# Altium PCB PCB2.pcbdoc
Units mm, origin at the board's own origin, x right, y up, seen from the top; angles counter-clockwise.
Board outline 129.16 x 123.45 mm, 4 copper layers (Top Layer, Inner1, Inner2, Bottom Layer); 95 components, 56 nets, 306 pads, 275 vias.
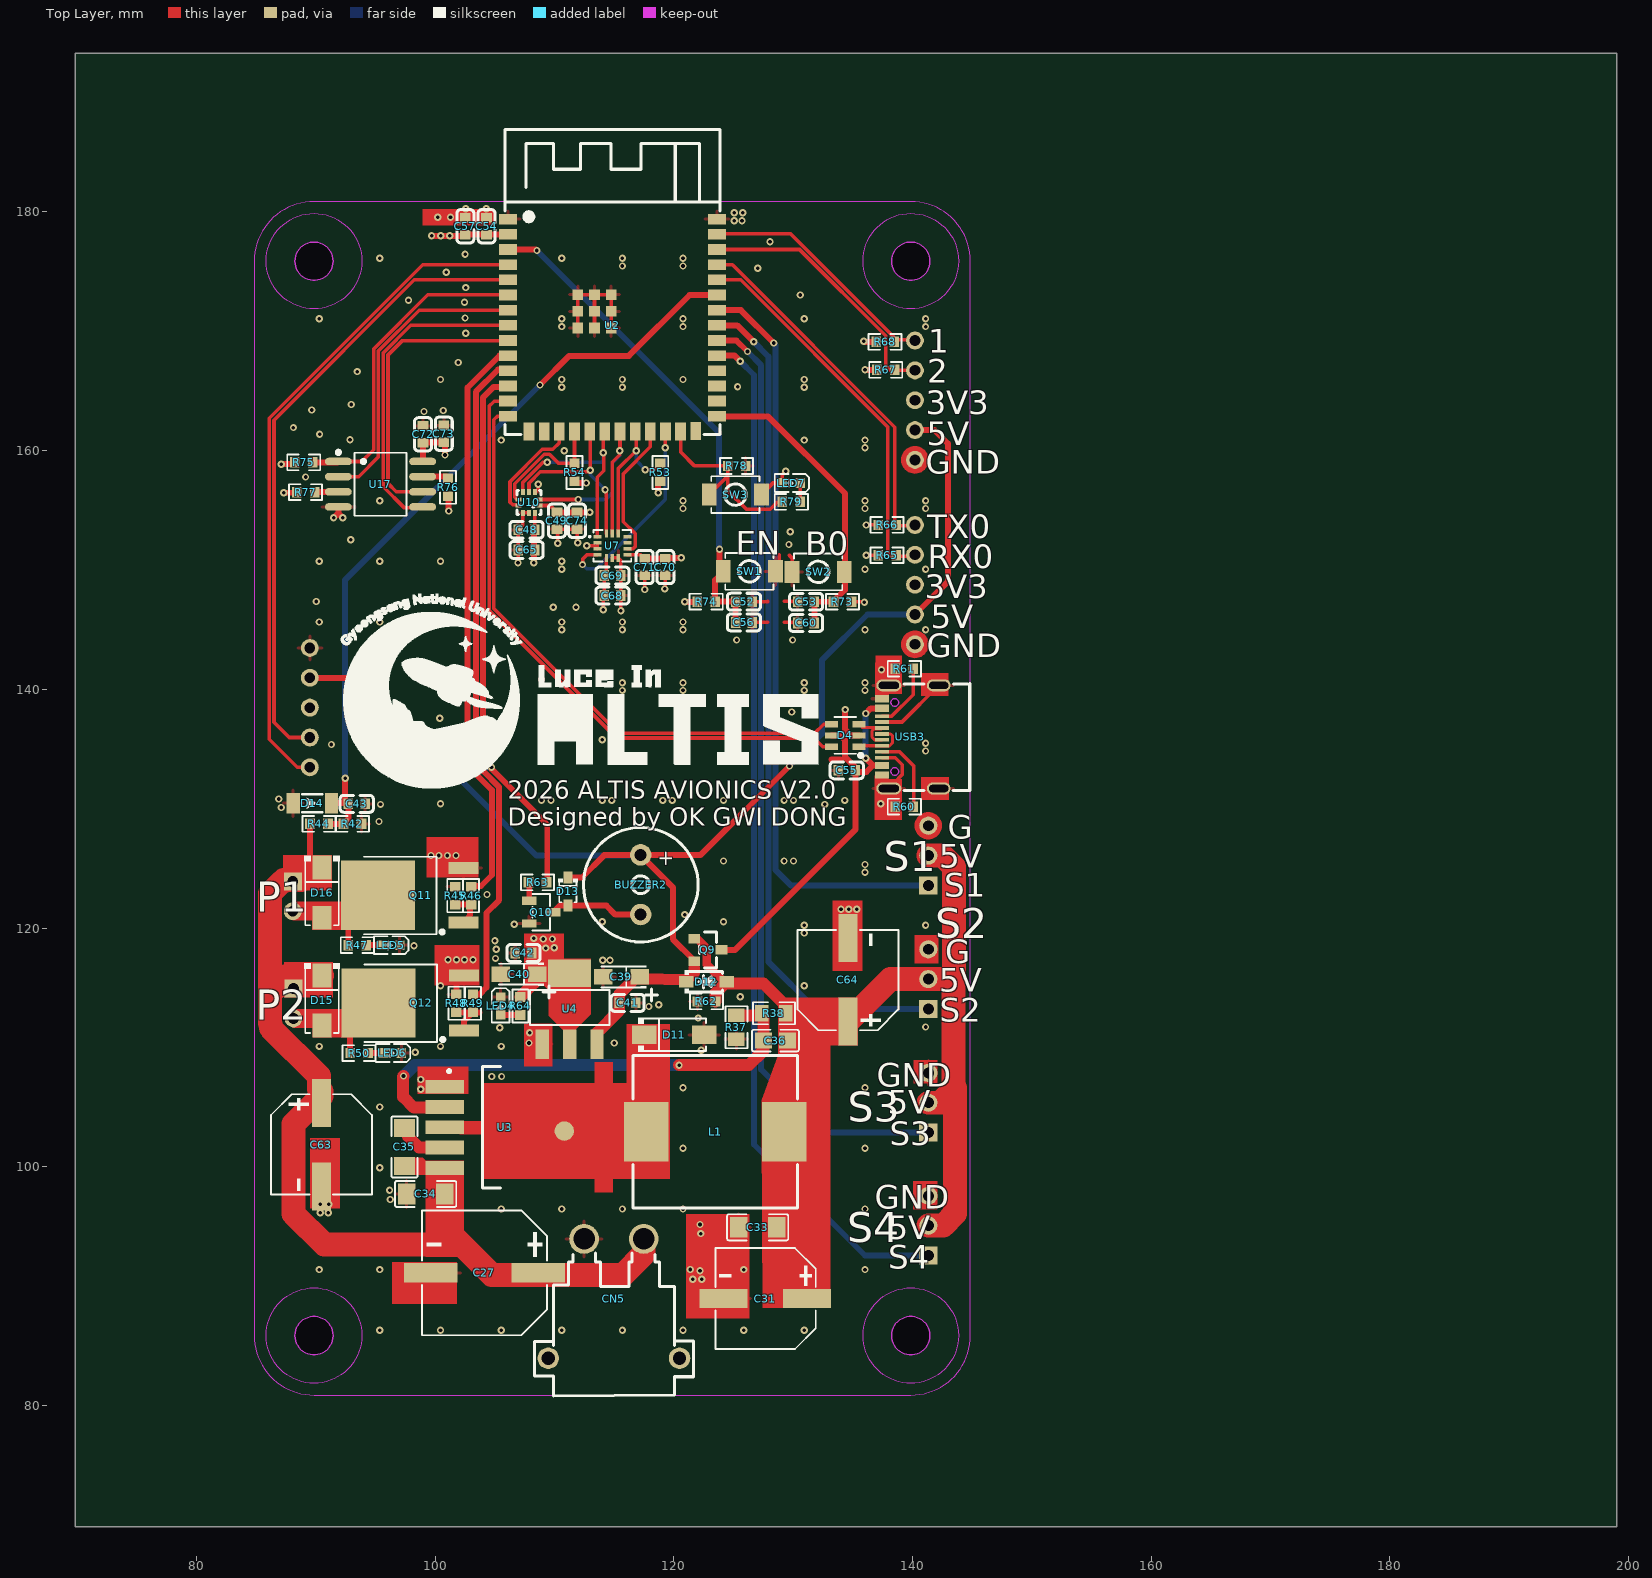
[diagram p0: Top Layer view]
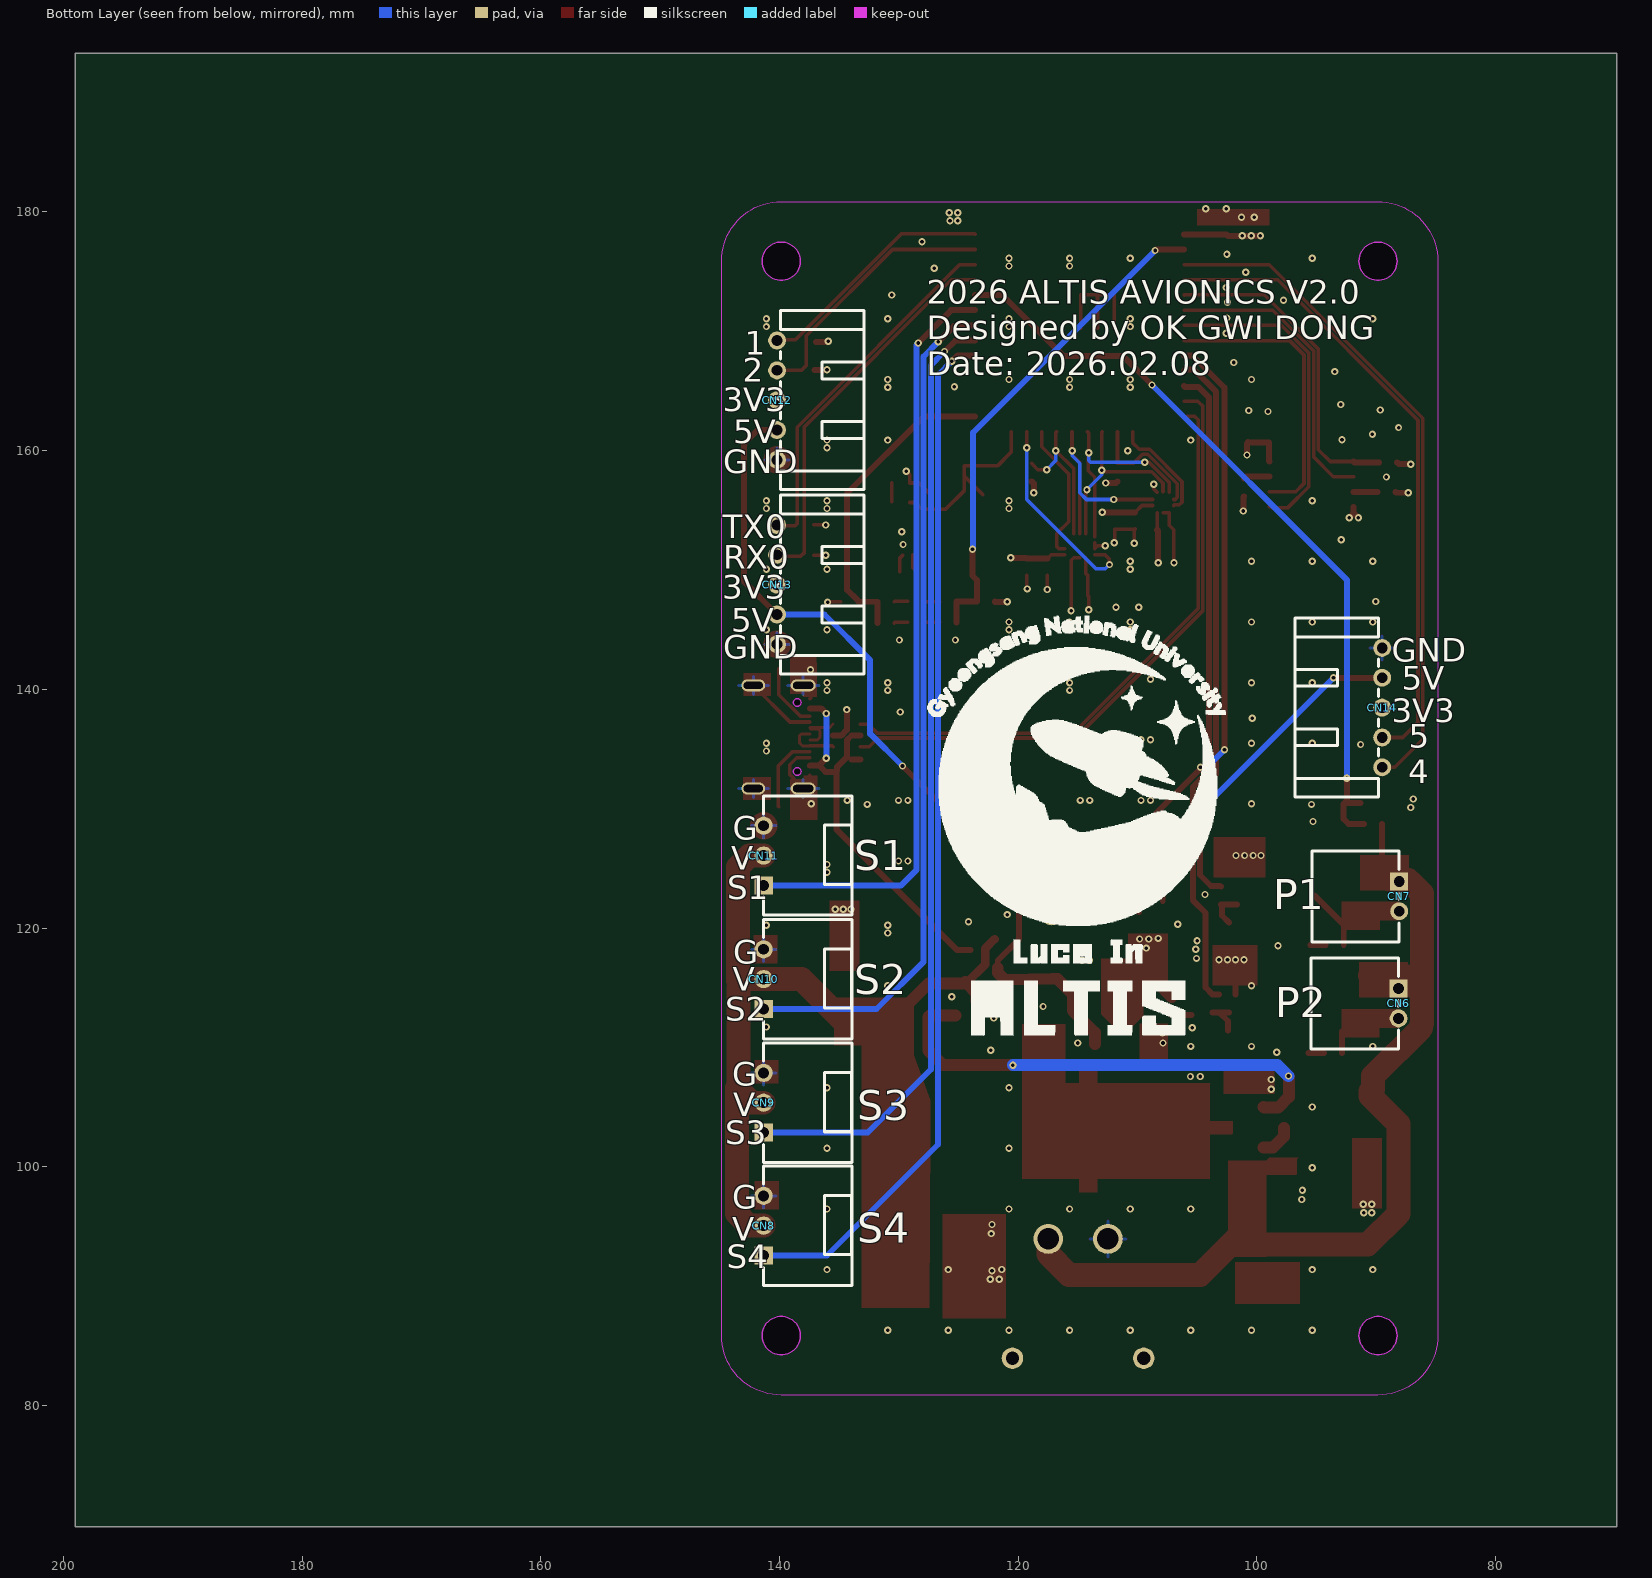
[diagram p1: Bottom Layer view, seen from below]
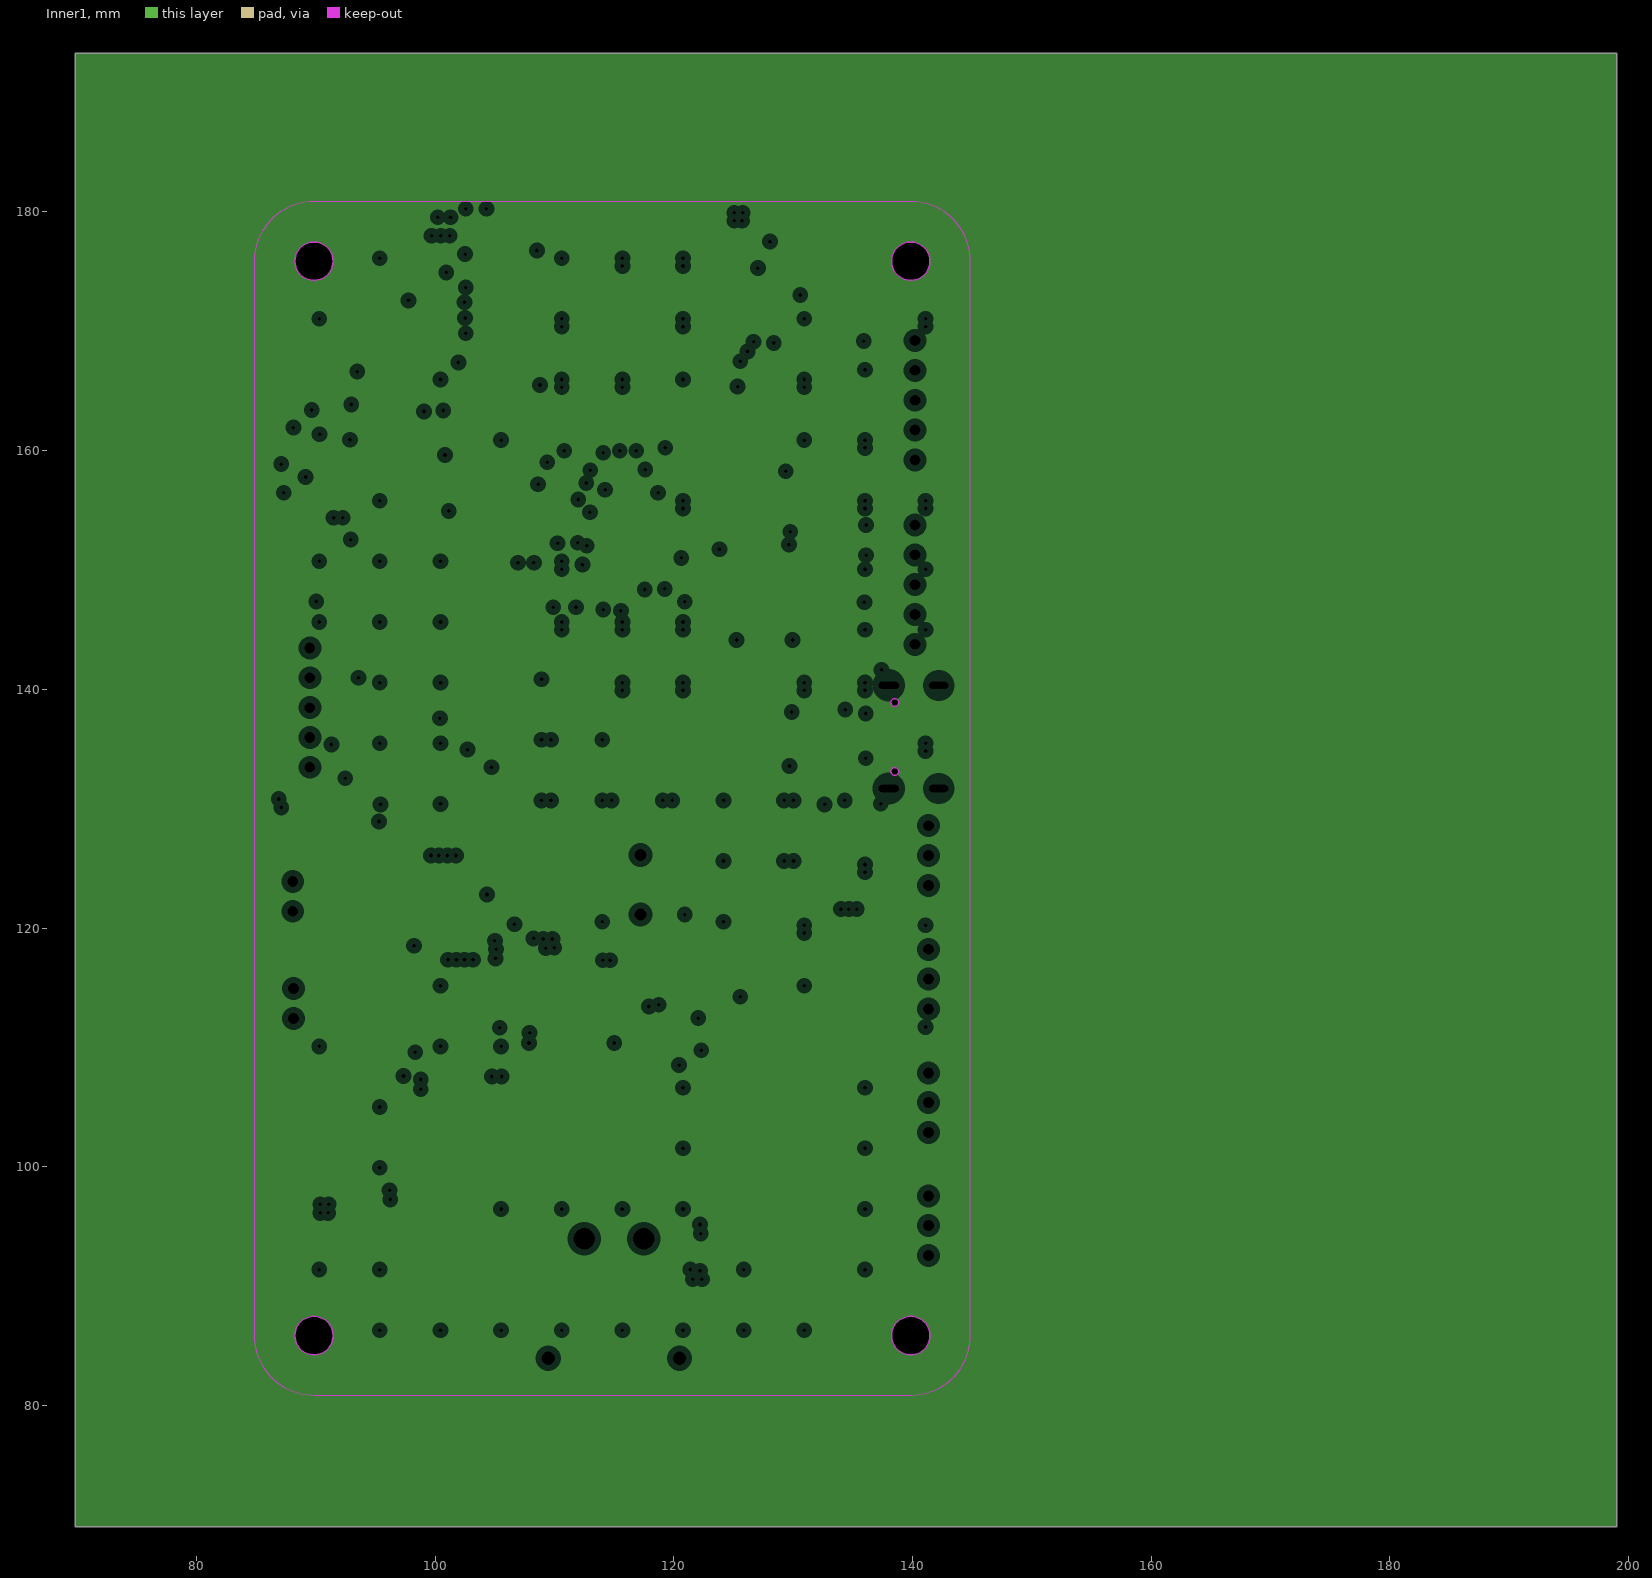
[diagram p2: Inner1, clearances drawn from the general rule]
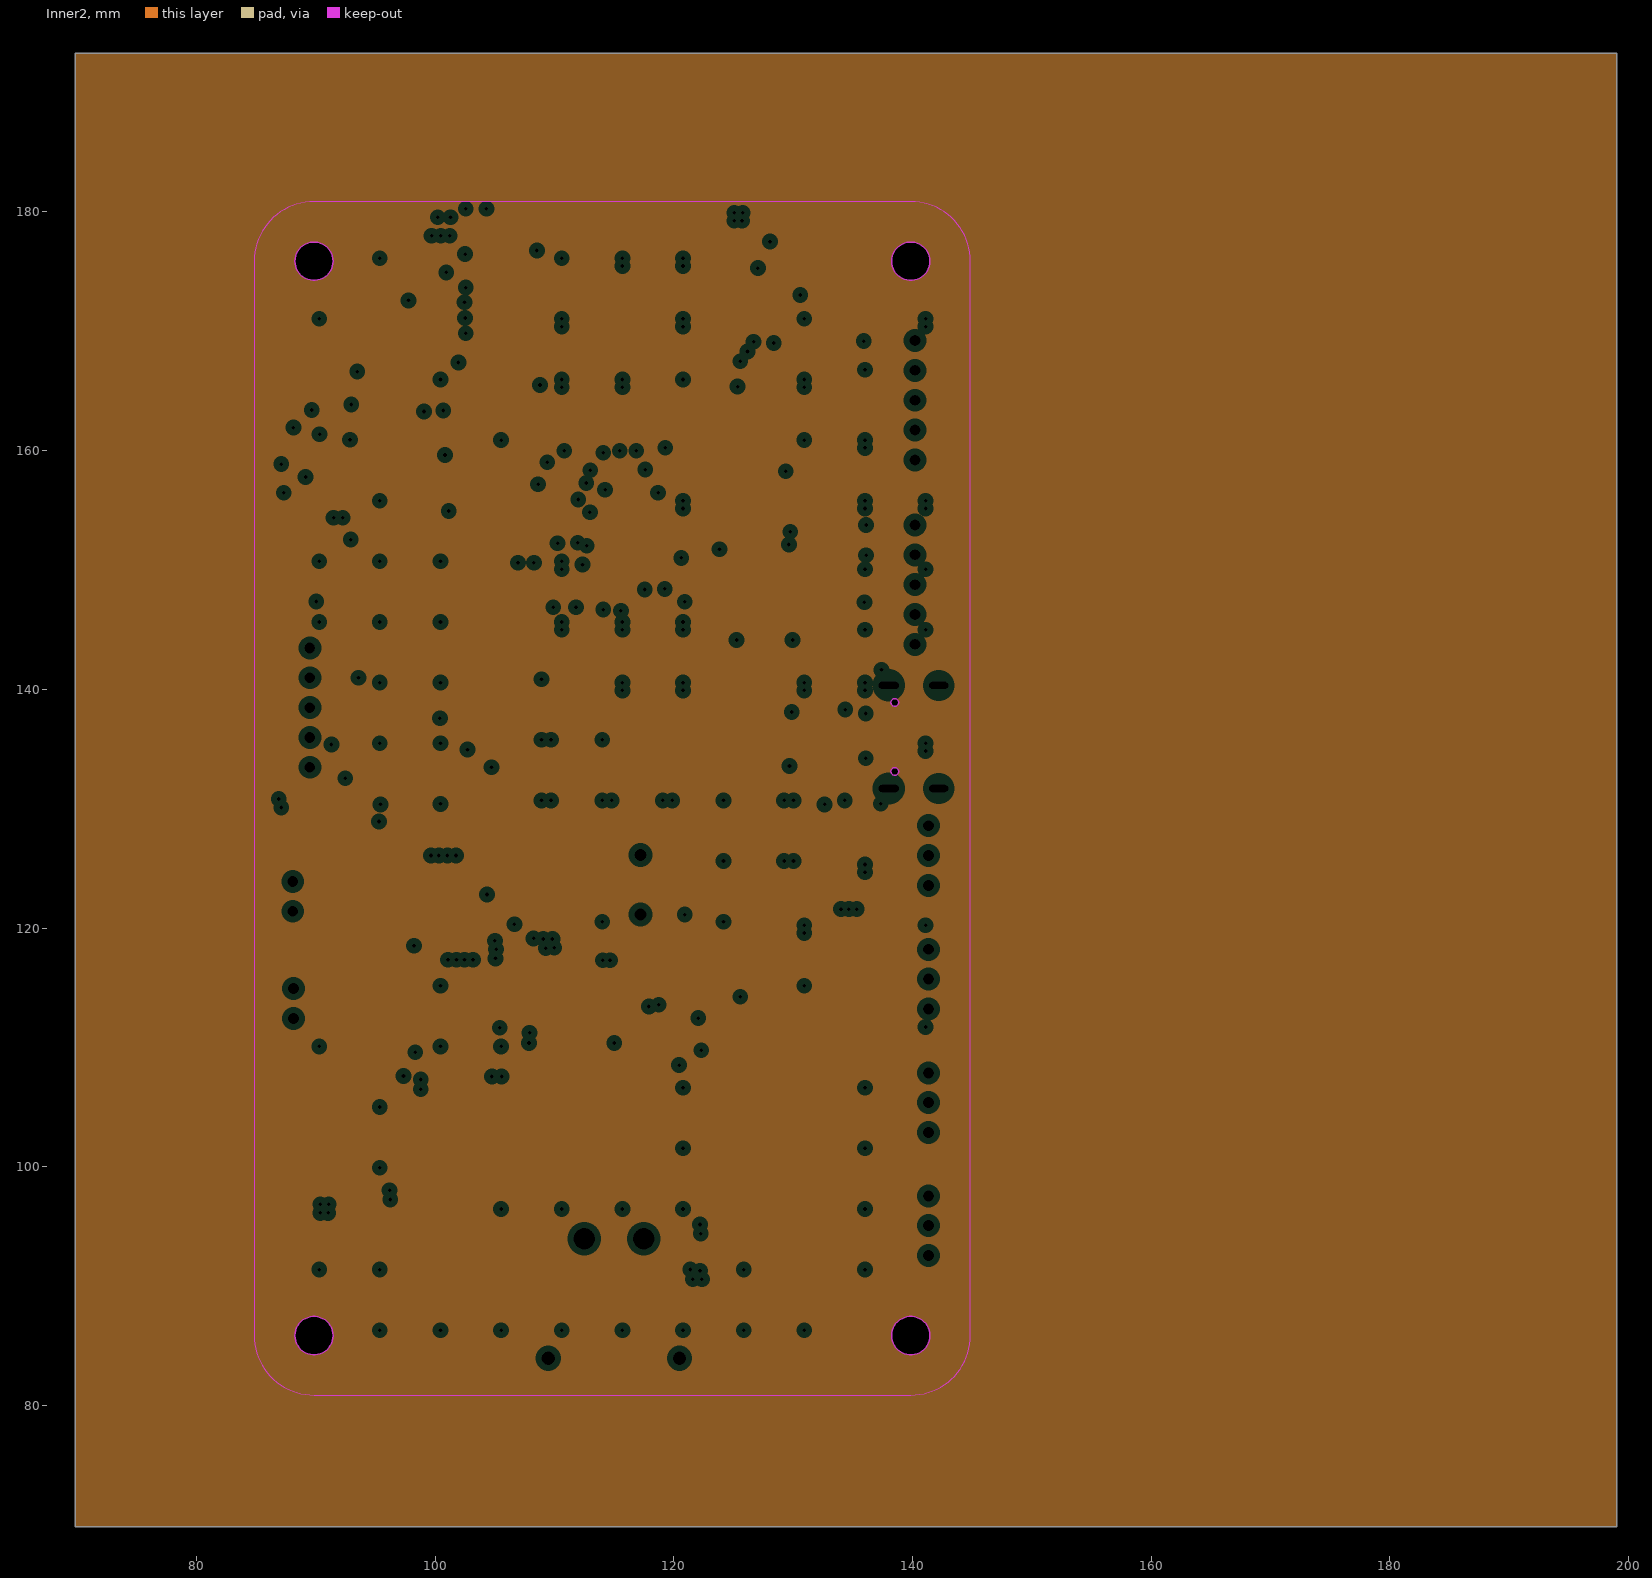
[diagram p3: Inner2, clearances drawn from the general rule]

## Layer stack, top to bottom
Top Layer: signal copper (thickness not stored)
Dielectric: dielectric 0.32, FR-4, Dk 4.8
Inner1: plane copper (thickness not stored)
Dielectric: dielectric 0.32, FR-4, Dk 4.8
Inner2: plane copper (thickness not stored)
Dielectric: dielectric 0.32, FR-4, Dk 4.8
Bottom Layer: signal copper (thickness not stored)

## Board outline
199.009,69.85 69.85,69.85 69.85,193.301 199.009,193.301
cut-out: 91.458,175.881 cw(c89.858,175.881) 88.258,175.881 cw(c89.858,175.881)
cut-out: 141.458,175.881 cw(c139.858,175.881) 138.258,175.881 cw(c139.858,175.881)
cut-out: 141.458,85.863 cw(c139.858,85.863) 138.258,85.863 cw(c139.858,85.863)
cut-out: 91.458,85.863 cw(c89.858,85.863) 88.258,85.863 cw(c89.858,85.863)

## Design rules (kind name [scope] priority, off if disabled: settings)
BoardOutlineClearance copperThickness1oz [All] p0: genericclearance=0.254 ignorepadtopadclearanceinfootprint=FALSE except(0: Arc-SplitContinuation Track-SplitContinuation SMDPad-SplitContinuation THPad-SplitContinuation Via-SplitContinuation Fill-SplitContinuation Poly-SplitContinuation Region-SplitContinuation Text-SplitContinuation; 0.152: Track-CutoutEdge SMDPad-CutoutEdge THPad-CutoutEdge Via-CutoutEdge Region-CutoutEdge; 0.3: Track-OutlineEdge SMDPad-OutlineEdge THPad-OutlineEdge Via-OutlineEdge Fill-OutlineEdge Region-OutlineEdge Poly-OutlineEdge Text-OutlineEdge Fill-CutoutEdge)
BoardOutlineClearance copperThickness2oz [All] p0: genericclearance=0.254 ignorepadtopadclearanceinfootprint=FALSE except(0: Arc-SplitContinuation Track-SplitContinuation SMDPad-SplitContinuation THPad-SplitContinuation Via-SplitContinuation Fill-SplitContinuation Poly-SplitContinuation Region-SplitContinuation Text-SplitContinuation; 0.152: Track-CutoutEdge SMDPad-CutoutEdge THPad-CutoutEdge Via-CutoutEdge Region-CutoutEdge; 0.3: Track-OutlineEdge SMDPad-OutlineEdge THPad-OutlineEdge Via-OutlineEdge Fill-OutlineEdge Region-OutlineEdge Poly-OutlineEdge Text-OutlineEdge Fill-CutoutEdge)
Clearance copperThickness1oz [(InNet('+VIN') OR InNet('GND') OR InNet('+VBAT') OR InNet('+5V') OR InNet('$3N1880') OR InNet('$3N2422') OR InNet('+3.3V') OR InNet('V_BATT') OR InNet('RESET') OR InNet('BOOT') OR InNet('+VUSB') OR InNet('$4N18') OR InNet('$4N1287') OR InNet('D+') OR InNet('D-') OR InNet('USB_D-') OR InNet('USB_D+') OR InNet('$3N2267') OR InNet('SERVO1') OR InNet('SERVO2') OR InNet('SERVO3') OR InNet('SERVO4') OR InNet('$3N4248') OR InNet('$4N14') OR InNet('$4N1281') OR InNet('$4N793') OR InNet('$4N1295') OR InNet('PYRO2') OR InNet('PYRO1') OR InNet('CS_BARO') OR InNet('BUZZER') OR InNet('RX0') OR InNet('TX0') OR InNet('RX1') OR InNet('TX1') OR InNet('INT_BARO') OR InNet('MOSI') OR InNet('MISO') OR InNet('SCK') OR InNet('INT1_ACCEL') OR InNet('$1N7652') OR InNet('$1N7654') OR InNet('$1N8097') OR InNet('$1N8111') OR InNet('M_CLK') OR InNet('M_IO0') OR InNet('M_IO2') OR InNet('M_IO3') OR InNet('M_CS') OR InNet('M_IO1') OR InNet('CS_IMU') OR InNet('INT2_GYRO') OR InNet('$1N3656') OR InNet('$1N11705') OR InNet('IO4') OR InNet('IO5'))] p1: gap=0.178 ignorepadtopadclearanceinfootprint=FALSE except(0.102: Track-Track; 0.152: Track-SMDPad SMDPad-SMDPad Track-THPad SMDPad-THPad THPad-THPad Track-Via SMDPad-Via THPad-Via Via-Via SMDPad-Fill THPad-Fill Via-Fill Fill-Fill Track-Region SMDPad-Region THPad-Region Via-Region Region-Region Track-Poly SMDPad-Poly THPad-Poly Via-Poly Fill-Poly Region-Poly Poly-Poly Track-Text SMDPad-Text THPad-Text Via-Text Fill-Text Region-Text Poly-Text Text-Text; 0.175: Track-Hole SMDPad-Hole THPad-Hole Via-Hole Fill-Hole Region-Hole Poly-Hole Text-Hole Sheet-Hole; 0.3: Track-Fill Fill-Region Track-Sheet SMDPad-Sheet THPad-Sheet Via-Sheet Fill-Sheet Region-Sheet Poly-Sheet Text-Sheet)
Clearance copperThickness2oz [All] p1: gap=0.178 ignorepadtopadclearanceinfootprint=FALSE except(0.152: Track-SMDPad SMDPad-SMDPad Track-THPad SMDPad-THPad THPad-THPad Track-Via SMDPad-Via THPad-Via Via-Via SMDPad-Fill THPad-Fill Via-Fill Fill-Fill Track-Region SMDPad-Region THPad-Region Via-Region Region-Region Track-Poly SMDPad-Poly THPad-Poly Via-Poly Fill-Poly Region-Poly Poly-Poly Track-Text SMDPad-Text THPad-Text Via-Text Fill-Text Region-Text Poly-Text Text-Text; 0.175: Track-Hole SMDPad-Hole THPad-Hole Via-Hole Fill-Hole Region-Hole Poly-Hole Text-Hole Sheet-Hole; 0.203: Track-Track; 0.3: Track-Fill Fill-Region Track-Sheet SMDPad-Sheet THPad-Sheet Via-Sheet Fill-Sheet Region-Sheet Poly-Sheet Text-Sheet)
DiffPairsRouting differentialPair [All] p1: maxuncoupledlength=10 minlimit=6 maxlimit=6 mostfreqgap=6 toplayer_minwidth=5 toplayer_prefwidth=10 toplayer_maxwidth=100 bottomlayer_minwidth=5 bottomlayer_prefwidth=10 bottomlayer_maxwidth=100
PasteMaskExpansion pasteMaskExpansion [All] p1: expansion=0
PlaneConnect innerPlane [All] p1: planeconnectstyle=Relief reliefexpansion=0.508 reliefentries=4 reliefconductorwidth=0.254 reliefairgap=0.254
PolygonConnect copperRegion [All] p1: connectstyle=Relief reliefentries=4 reliefconductorwidth=10 polygonreliefangle="90 Angle" airgapwidth=10
RoutingVias viaSize [All] p1: viastyle="Through Hole" holewidth=12.0078 minholewidth=11.811 maxholewidth=248.0314 width=24.0158 minwidth=19.685 maxwidth=393.7008
SolderMaskExpansion solderMaskExpansion [All] p1: useseparateexpansions=TRUE expansion=2 expansionbottom=2
Width copperThickness1oz [All] p1: maxlimit=100 minlimit=5 preferedwidth=10
Width copperThickness2oz [All] p1: maxlimit=100 minlimit=8 preferedwidth=10

## Components (designator, comment, footprint, x,y, rotation, side; value= is the part's Value field where it differs from the comment)
BUZZER2 "HNB09A05" BUZ-TH_BD9.6-P5.00-D0.7-FD 117.23,123.633 r270 top
C27 "UWT1H221MNL1GS" CAP-SMD_BD10.0-L10.3-W10.3-LS11.3-FD 104.141,91.121 r180 top
C31 "RVT1E331M0810_C335985" CAP-SMD_BD8.0-L8.3-W8.3-LS9.3-FD-1 127.665,88.962 r180 top
C33 "CL31B105KBHNNNE" C1206 127.03,94.931 r0 top
C34 "CL31B105KBHNNNE" C1206 99.217,97.725 r0 top
C35 "CL31B105KBHNNNE" C1206 97.439,101.662 r270 top
C36 "0805B333K500NT" C0805 128.515,110.577 r0 top
C39 "TAJA106K016RNJ" CAP-SMD_L3.2-W1.6-RD-C7171 115.62,115.911 r180 top
C40 "TAJA106K016RNJ" CAP-SMD_L3.2-W1.6-RD-C7171 107.039,116.14 r180 top
C41 "CC0603KRX7R9BB104" C0603 116.133,113.736 r180 top
C42 "CC0603KRX7R9BB104" C0603 107.42,117.918 r0 top
C43 "CC0603KRX7R9BB104" C0603 93.438,130.413 r180 top
C48 "CC0603KRX7R9BB104" C0603 107.667,153.372 r0 top
C49 "CC0603KRX7R9BB104" C0603 110.207,154.134 r90 top
C52 "CC0603KRX7R9BB104" C0603 125.874,147.345 r180 top
C53 "CC0603KRX7R9BB104" C0603 131.086,147.342 r0 top
C54 "CC0603KRX7R9BB104" C0603 104.317,178.803 r270 top
C55 "CC0603KRX7R9BB104" C0603 134.492,133.22 r0 top
C56 "CL10A105KB8NNNC" C0603 125.874,145.611 r180 top
C57 "CL10A106KP8NNNC" C0603 102.539,178.803 r270 top
C60 "CL10A105KB8NNNC" C0603 131.086,145.564 r0 top
C63 "RVT1E331M0810_C335985" CAP-SMD_BD8.0-L8.3-W8.3-LS9.3-FD-1 90.48,101.853 r270 top
C64 "RVT1E331M0810_C335985" CAP-SMD_BD8.0-L8.3-W8.3-LS9.3-FD-1 134.595,115.674 r90 top
C65 "CL10A106KP8NNNC" C0603 107.667,151.68 r0 top
C68 "CL10A106KP8NNNC" C0603 114.858,147.855 r180 top
C69 "CC0603KRX7R9BB104" C0603 114.858,149.538 r180 top
C70 "CL10A106KP8NNNC" C0603 119.295,150.252 r90 top
C71 "CC0603KRX7R9BB104" C0603 117.561,150.252 r90 top
C72 "CC0603KRX7R9BB104" C0603 98.997,161.37 r270 top
C73 "CL10A106KP8NNNC" C0603 100.731,161.421 r270 top
C74 "CL10A106KP8NNNC" C0603 111.9,154.128 r90 top
CN5 "XT30PW-M30.G.Y" CONN-TH_XT30PW-M 114.985,88.962 r0 top
CN6 "ZX-XH2.54-2PWZ" CONN-TH_2P-P2.50_ZX-XH2.54-2PWZ 88.134,113.685 r270 bottom
CN7 "ZX-XH2.54-2PWZ" CONN-TH_2P-P2.50_ZX-XH2.54-2PWZ 88.083,122.661 r270 bottom
CN8 "HX-XH2.54-3PWZ" CONN-TH_3P-P2.50_BX-HA2.54-3PWZ 141.327,95.07 r90 bottom
CN9 "HX-XH2.54-3PWZ" CONN-TH_3P-P2.50_BX-HA2.54-3PWZ 141.327,105.372 r90 bottom
CN10 "HX-XH2.54-3PWZ" CONN-TH_3P-P2.50_BX-HA2.54-3PWZ 141.327,115.725 r90 bottom
CN11 "HX-XH2.54-3PWZ" CONN-TH_3P-P2.50_BX-HA2.54-3PWZ 141.327,126.078 r90 bottom
CN12 "HX-XH2.54-5PWZ" CONN-TH_HX-XH2.54-5PWZ 140.205,164.226 r90 bottom
CN13 "HX-XH2.54-5PWZ" CONN-TH_HX-XH2.54-5PWZ 140.205,148.773 r90 bottom
CN14 "HX-XH2.54-5PWZ" CONN-TH_HX-XH2.54-5PWZ 89.511,138.471 r270 bottom
D4 "USBLC6-2SC6_C2687116" SOT-23-6_L2.9-W1.6-P0.95-LS2.8-BL 134.365,136.141 r90 top
D11 "SS54_C22452" SMA_L4.4-W2.8-LS5.4-R-RD 120.045,111.06 r0 top
D12 "B5819W SL" SOD-123_L2.7-W1.6-LS3.7-RD-1 122.74,115.505 r0 top
D13 "1N4148WS_C2128" SOD-323_L1.8-W1.3-LS2.5-RD 111.135,123.069 r270 top
D14 "ZMM3V3" LL-34_L3.5-W1.5-RD 89.715,130.464 r180 top
D15 "1N4007_C727081" SMA_L4.3-W2.5-LS5.0-RD 90.531,113.94 r270 top
D16 "1N4007_C727081" SMA_L4.3-W2.5-LS5.0-RD 90.531,122.967 r270 top
L1 "CYA1265-47UH" IND-SMD_L13.8-W12.8 123.474,102.932 r0 top
LED4 "KT-0603R" LED0603-RD 105.489,113.473 r270 top
LED5 "KT-0603R" LED0603-RD 96.275,118.574 r180 top
LED6 "KT-0603R" LED0603-RD 96.428,109.536 r180 top
LED7 "KT-0603R" LED0603-RD 129.852,157.29 r180 top
Q9 "AO3401A_C15127" SOT-23_L2.9-W1.3-P1.90-LS2.4-BR 122.867,118.172 r180 top
Q10 "SS8050(RANGE:200-350)_C2150" SOT-23-3_L2.9-W1.3-P1.90-LS2.4-BR 108.891,121.335 r180 top
Q11 "IRLR7843TR(UMW)" TO-252-2_L6.5-W6.1-P4.58-LS10.0-BL 98.79,122.744 r90 top
Q12 "IRLR7843TR(UMW)" TO-252-2_L6.5-W6.1-P4.58-LS10.0-BL 98.841,113.727 r90 top
R37 "0805W8F3301T5E" R0805 125.247,111.694 r270 top
R38 "0805W8F1002T5E" R0805 128.388,112.863 r0 top
R42 "0603WAF3301T5E" R0603 93.081,128.73 r180 top
R44 "0603WAF2402T5E" R0603 90.276,128.73 r180 top
R45 "0603WAF1002T5E" R0603 101.68,122.717 r270 top
R46 "0603WAF2000T5E" R0603 103.026,122.717 r270 top
R47 "0603WAF1001T5E" R0603 93.481,118.569 r180 top
R48 "0603WAF1002T5E" R0603 101.782,113.7 r270 top
R49 "0603WAF2000T5E" R0603 103.179,113.7 r270 top
R50 "0603WAF1001T5E" R0603 93.634,109.531 r180 top
R53 "0603WAF1002T5E" R0603 118.873,158.177 r270 top
R54 "0603WAF1002T5E" R0603 111.683,158.177 r270 top
R60 "0603WAF5101T5E" R0603 139.318,130.172 r180 top
R61 "0603WAF5101T5E" R0603 139.318,141.729 r180 top
R62 "0603WAF1002T5E" R0603 122.74,113.854 r0 top
R63 "0603WAF1001T5E" R0603 108.585,123.834 r180 top
R64 "0603WAF1001T5E" R0603 107.14,113.473 r90 top
R65 "0603WAF4701T5E" R0603 137.871,151.237 r180 top
R66 "0603WAF4701T5E" R0603 137.871,153.777 r180 top
R67 "0603WAF4701T5E" R0603 137.757,166.776 r180 top
R68 "0603WAF4701T5E" R0603 137.706,169.122 r180 top
R73 "0603WAF1002T5E" R0603 134.134,147.342 r0 top
R74 "0603WAF1002T5E" R0603 122.712,147.345 r180 top
R75 "0603WAF1002T5E" R0603 89.001,159.024 r180 top
R76 "0603WAF1002T5E" R0603 101.088,156.933 r270 top
R77 "0603WAF1002T5E" R0603 89.154,156.525 r180 top
R78 "0603WAF1002T5E" R0603 125.262,158.718 r180 top
R79 "0603WAF1001T5E" R0603 129.852,155.709 r180 top
SW1 "TS-1088-AR02016" SW-SMD_L3.9-W3.0-P4.45 126.333,149.895 r180 top
SW2 "TS-1088-AR02016" SW-SMD_L3.9-W3.0-P4.45 132.096,149.844 r0 top
SW3 "TS-1088-AR02016" SW-SMD_L3.9-W3.0-P4.45 125.16,156.321 r0 top
U2 "ESP32-S3-WROOM-1-N16R8" WIRELM-SMD_ESP32-S3-WROOM-1 114.858,170.496 r0 top
U3 "XL4015E1" TO-263-5_L10.2-W8.9-P1.70-TL 105.821,103.313 r0 top
U4 "AMS1117-3.3_C6186" SOT-223-3_L6.5-W3.4-P2.30-LS7.0-BR 111.28,113.244 r270 top
U7 "LSM6DSO32TR" LGA-14_L3.0-W2.5-P0.50-TL 114.858,152.037 r0 top
U10 "BMP388" SENSORM-SMD_BMP388 107.871,155.658 r270 top
U17 "MX25L25645GM2I-08G" SOIC-8_L5.3-W5.3-P1.27-LS8.0-BL 95.427,157.188 r270 top
USB3 "FG-ST-C-16P-RAT-7.35" USB-C-SMD_FG-ST-C-16P-RAT-7.35 139.826,136.014 r90 top

## Footprints (in the part's own frame and the unit in brackets; to place one, negate y for a bottom-side part, rotate by r counter-clockwise, add the part's x,y. Pads: shape width x height; smd on the part's side, far side on the other; paste and mask are expansions set on the pad)
BUZ-TH_BD9.6-P5.00-D0.7-FD [mm]
  round 1.8 hole 1: 1(-2.5,0) 2(2.5,0)
  silkscreen extent -4.8,-4.8 4.8,4.8
C0603 [mm]
  rect 0.8x0.9 smd: 1(-0.7,0) 2(0.7,0)
  silkscreen extent -1.39,-0.71 1.39,0.71
C0805 [mm]
  rect 1.41x1.35 smd: 1(-1,0) 2(1,0)
  silkscreen extent -1.96,-0.9 1.96,0.9
C1206 [mm]
  rect 1.485x1.728 smd: 1(-1.593,0) 2(1.593,0)
  silkscreen extent -2.56,-1.09 2.56,1.09
CAP-SMD_BD8.0-L8.3-W8.3-LS9.3-FD-1 [mm]
  rect 4x1.6 smd: 1(-3.5,0) 2(3.5,0)
  silkscreen extent -4.23,-4.23 4.18,4.23
CAP-SMD_BD10.0-L10.3-W10.3-LS11.3-FD [mm]
  rect 4.5x1.65 smd: 1(-4.5,0) 2(4.5,0)
  silkscreen extent -5.23,-5.23 5.23,5.23
CAP-SMD_L3.2-W1.6-RD-C7171 [mm]
  rect 1.53x1.296 smd: 1(-1.53,0) 2(1.53,0)
  silkscreen extent -3,-0.95 1.68,2
CONN-TH_2P-P2.50_ZX-XH2.54-2PWZ [mm]
  rect 1.524x1.5 hole 0.9: 1(-1.25,0)
  round 1.5 hole 0.9: 2(1.25,0)
  silkscreen extent -3.8,-7.32 3.81,0
CONN-TH_3P-P2.50_BX-HA2.54-3PWZ [mil]
  rect 60x60 hole 36: 1(-98.42,0)
  round 60 hole 36: 2(0,0) 3(98.43,0)
  silkscreen extent -197,-292 197,0
CONN-TH_HX-XH2.54-5PWZ [mm]
  round 1.5 hole 0.9: 1(-5,0) 2(-2.5,0) 3(0,0) 4(2.5,0) 5(5,0)
  silkscreen extent -7.5,-7.3 7.5,-0.3
CONN-TH_XT30PW-M [mm]
  round 2.5 hole 1.8: 1(-2.5,5) 2(2.5,5)
  round 1.8 hole 1.1: 3(5.5,-5) 4(-5.5,-5)
  silkscreen extent -6.65,-8.15 6.65,3.81
IND-SMD_L13.8-W12.8 [mm]
  rect 3.735x5 smd: 1(-5.768,0) 2(5.768,0)
  silkscreen extent -6.9,-6.4 6.9,6.4
LED0603-RD [mm]
  rect 0.8x0.8 smd: 1(-0.749,0) 2(0.749,0)
  silkscreen extent -1.49,-0.75 1.39,0.76
LGA-14_L3.0-W2.5-P0.50-TL [mm]
  rect 0.675x0.28 smd: 1(-1.262,0.75) 2(-1.262,0.25) 3(-1.262,-0.25) 4(-1.262,-0.75) 8(1.262,-0.75) 9(1.262,-0.25) 10(1.262,0.25) 11(1.262,0.75)
  rect 0.28x0.675 smd: 5(-0.5,-1.012) 6(0,-1.012) 7(0.5,-1.012) 12(0.5,1.012) 13(0,1.012) 14(-0.5,1.012)
  silkscreen extent -1.98,-1.33 1.58,1.33
LL-34_L3.5-W1.5-RD [mm]
  rect 1.1x1.7 smd: 1(-1.6,0) 2(1.6,0)
  silkscreen extent -0.85,-0.75 0.85,0.75
R0603 [mm]
  rect 0.806x0.864 smd: 1(-0.753,0) 2(0.753,0)
  silkscreen extent -1.39,-0.66 1.39,0.66
R0805 [mm]
  rect 1.133x1.377 smd: 1(-1,0) 2(1,0)
  silkscreen extent -1.76,-0.92 1.76,0.92
SENSORM-SMD_BMP388 [mm]
  rect 0.3x0.5 smd: 1(0.25,0.871) 2(-0.25,0.871) 6(-0.25,-0.871) 7(0.25,-0.871)
  rect 0.5x0.3 smd: 3(-0.869,0.5) 4(-0.869,0) 5(-0.869,-0.5) 8(0.869,-0.5) 9(0.869,0) 10(0.869,0.5)
  silkscreen extent -1.02,-1.02 1.02,1.02
SMA_L4.3-W2.5-LS5.0-RD [mm]
  rect 2x1.593 smd: 1(-2.1,0) 2(2.1,0)
  silkscreen extent -3.11,-1.48 2.73,1.48
SMA_L4.4-W2.8-LS5.4-R-RD [mm]
  rect 2.063x1.539 smd: 1(2.504,0) 2(-2.504,0)
  silkscreen extent -3.03,-1.43 2.65,1.43
SOD-123_L2.7-W1.6-LS3.7-RD-1 [mm]
  rect 1.2x0.95 smd: 1(-1.7,0) 2(1.7,0)
  silkscreen extent -1.81,-0.98 1.35,0.98
SOD-323_L1.8-W1.3-LS2.5-RD [mm]
  rect 1x0.75 smd: 1(-1.173,0) 2(1.173,0)
  silkscreen extent -1.08,-0.8 0.9,0.8
SOIC-8_L5.3-W5.3-P1.27-LS8.0-BL [mm]
  oval 0.63x2.25 smd: 1(-1.905,-3.53) 2(-0.635,-3.53) 3(0.635,-3.53) 4(1.905,-3.53) 5(1.905,3.53) 6(0.635,3.53) 7(-0.635,3.53) 8(-1.905,3.53)
  silkscreen extent -2.82,-3.68 2.64,2.18
SOT-23-3_L2.9-W1.3-P1.90-LS2.4-BR [mm]
  rect 1.25x0.7 smd: 1(1,-0.95) 2(1,0.95) 3(-1,0)
  silkscreen extent -0.73,-1.53 0.73,1.53
SOT-23-6_L2.9-W1.6-P0.95-LS2.8-BL [mm]
  rect 0.532x1.072 smd: 1(-0.95,-1.149) 2(0,-1.149) 3(0.95,-1.149) 4(0.95,1.149) 5(0,1.149) 6(-0.95,1.149)
  silkscreen extent -1.82,-1.45 1.54,0.89
SOT-23_L2.9-W1.3-P1.90-LS2.4-BR [mm]
  rect 1x0.8 smd: 1(1.15,-0.95) 2(1.15,0.95) 3(-1.15,0)
  silkscreen extent -0.7,-1.5 0.7,1.5
SOT-223-3_L6.5-W3.4-P2.30-LS7.0-BR [mm]
  rect 2.5x1.1 smd: 1(2.97,-2.3) 2(2.97,0) 3(2.97,2.3)
  rect 2.34x3.6 smd: 4(-2.97,0)
  silkscreen extent -1.57,-3.33 1.37,3.33
SW-SMD_L3.9-W3.0-P4.45 [mm]
  rect 1.23x1.86 smd: 1(-2.185,0) 2(2.185,0)
  silkscreen extent -2.03,-1.54 2.03,1.54
TO-252-2_L6.5-W6.1-P4.58-LS10.0-BL [mm]
  rect 1x2.54 smd: 1(-2.29,-3.587) 3(2.29,-3.587)
  rect 5.8x6.2 smd: 2(0,3.587)
  silkscreen extent -3.26,-1.96 3.24,4.77
TO-263-5_L10.2-W8.9-P1.70-TL [mm]
  rect 3.2x1.15 smd: 1(-5.008,3.404) 2(-5.008,1.702) 3(-5.008,0) 4(-5.008,-1.702) 5(-5.008,-3.404)
  round 1.626 smd: 6(5.008,-0.318)
  Top Layer region: 0.944,3.683 7.548,3.683 7.548,5.461 9.072,5.461 9.072,-5.461 7.548,-5.461 7.548,-4.317 0.944,-4.317
  silkscreen extent -4.77,-5.08 -0.33,5.08
USB-C-SMD_FG-ST-C-16P-RAT-7.35 [mm]
  oval 1x2.1 hole 0.6 slot 1.7 at 90 deg: 1(-4.32,1.807) 2(4.32,1.807)
  oval 1x2 hole 0.6 slot 1.6 at 90 deg copper offset 0,0: 3(-4.32,-2.373) 4(4.32,-2.373)
  rect 0.6x1.15 smd: A1B12(-3.2,2.372) A4B9(-2.4,2.372) B1A12(3.2,2.372) B4A9(2.4,2.372)
  rect 0.3x1.15 smd: A5(-1.25,2.372) A6(-0.25,2.372) A7(0.25,2.372) A8(1.25,2.372) B5(1.75,2.372) B6(0.75,2.372) B7(-0.75,2.372) B8(-1.75,2.372)
  Board Outline Layer circle w0.005: c2.89,1.307 r0.325
  Board Outline Layer circle w0.005: c-2.89,1.307 r0.325
  Board Outline Layer region: 2.89,0.982 2.749,1.015 2.636,1.105 2.573,1.235 2.573,1.38 2.636,1.51 2.749,1.6 2.89,1.632 2.89,1.632 3.031,1.6 3.144,1.51 3.207,1.38 3.207,1.235 3.144,1.105 3.031,1.015 2.89,0.982
  Board Outline Layer region: -2.89,0.982 -3.031,1.015 -3.144,1.105 -3.207,1.235 -3.207,1.38 -3.144,1.51 -3.031,1.6 -2.89,1.632 -2.89,1.632 -2.749,1.6 -2.636,1.51 -2.573,1.38 -2.573,1.235 -2.636,1.105 -2.749,1.015 -2.89,0.982
  Multi-Layer board cut-out: 2.89,0.982 2.749,1.015 2.636,1.105 2.573,1.235 2.573,1.38 2.636,1.51 2.749,1.6 2.89,1.632 2.89,1.632 3.031,1.6 3.144,1.51 3.207,1.38 3.207,1.235 3.144,1.105 3.031,1.015 2.89,0.982
  Multi-Layer board cut-out: -2.89,0.982 -3.031,1.015 -3.144,1.105 -3.207,1.235 -3.207,1.38 -3.144,1.51 -3.031,1.6 -2.89,1.632 -2.89,1.632 -2.749,1.6 -2.636,1.51 -2.573,1.38 -2.573,1.235 -2.636,1.105 -2.749,1.015 -2.89,0.982
  silkscreen extent -4.47,-4.97 4.47,0.54
WIRELM-SMD_ESP32-S3-WROOM-1 [mm]
  rect 1.5x0.9 smd: 1(-8.75,8.895) 2(-8.75,7.625) 3(-8.75,6.355) 4(-8.75,5.085) 5(-8.75,3.815) 6(-8.75,2.545) 7(-8.75,1.275) 8(-8.75,0.005) 9(-8.75,-1.265) 10(-8.75,-2.535) 11(-8.75,-3.805) 12(-8.75,-5.075) 13(-8.75,-6.345) 14(-8.75,-7.615) 27(8.75,-7.615) 28(8.75,-6.345) 29(8.75,-5.075) 30(8.75,-3.805) 31(8.75,-2.535) 32(8.75,-1.265) 33(8.75,0.005) 34(8.75,1.275) 35(8.75,2.545) 36(8.75,3.815) 37(8.75,5.085) 38(8.75,6.355) 39(8.75,7.625) 40(8.75,8.895)
  rect 0.9x1.5 smd: 15(-6.985,-8.895) 16(-5.715,-8.895) 17(-4.445,-8.895) 18(-3.175,-8.895) 19(-1.905,-8.895) 20(-0.635,-8.895) 21(0.635,-8.895) 22(1.905,-8.895) 23(3.175,-8.895) 24(4.445,-8.895) 25(5.715,-8.895) 26(6.985,-8.865)
  rect 0.9x0.9 smd: 41(-2.9,-0.225) 41(-2.9,1.175) 41(-2.9,2.575) 41(-1.5,-0.225) 41(-1.5,1.175) 41(-1.5,2.575) 41(-0.1,-0.225) 41(-0.1,1.175) 41(-0.1,2.575)
  silkscreen extent -9,-9.14 9.02,16.39

## Via types
v1: diameter 0.61, hole 0.305, Top Layer to Bottom Layer, 275 vias

## Nets (pads, with @x,y where several pads share a name; then routed paths per layer and width w, separated by ;. In a path a pad name is that pad's centre, name@x,y a point inside that pad or via, vN(x,y) a via of type N, cw(c..) or ccw(c..) an arc to the next point about the centre after c; other vN are vias at no path point)
$1N3656: R78.2 R79.2 SW3.1 U2.25 | length 15.8
  Top Layer w0.3: U2.25 120.573,159.888 121.743,158.718 R78.2 124.509,157.855 ; SW3.1 124.509,157.855 ; R79.2@129.099,155.658 128.654,155.658 128.085,155.089 126.086,155.089 124.509,156.667 124.509,157.855
$1N7652: BUZZER2.2 D13.2 Q10.3 | length 7.9
  Top Layer w0.5: Q10.3 110.452,121.896 D13.2 114.348,121.896 115.111,121.133 BUZZER2.2
$1N7654: Q10.1 R63.2 | length 1.6
  Top Layer w0.5: R63.2 107.891,123.775 Q10.1
$1N8097: R60.1 USB3.A5 | length 6.6
  Top Layer w0.3: USB3.A5 138.914,134.764 140.122,133.556 140.122,130.223 R60.1
$1N8111: R61.1 USB3.B5 | length 5.5
  Top Layer w0.3: USB3.B5 138.274,137.764 140.071,139.561 R61.1
$1N11705: LED7.1 R79.1 | length 1.6
  Top Layer w0.3: LED7.1 130.606,157.286 R79.1
$3N1880: C35.1 U3.4 | length 2.8
  Top Layer w1: C35.1@97.722,103.255 97.722,102.551 98.662,101.611 U3.4@99.436,101.611
$3N2267: D11.2 L1.1 U3.3 U3.6
$3N2422: C36.1 R37.1 R38.1 U3.2 | length 40.4
  Top Layer w1: v1(97.361,107.605) 97.332,107.576 97.332,105.853 98.221,104.964 99.385,104.964 U3.2@99.436,105.015 ; v1(120.446,108.52) 126.293,108.52 127.515,109.742 C36.1 127.515,112.567 127.388,112.694 R37.1
  Bottom Layer w1: v1(97.361,107.605) 98.276,108.52 v1(120.446,108.52)
$3N4248: LED4.2 R64.1 | length 1.7
  Top Layer w0.5: LED4.2 107.136,112.724 R64.1
$4N14: LED5.2 R47.1 | length 1.3
  Top Layer w0.5: R47.1 95.521,118.569 LED5.2
$4N18: CN7.2 D16.2 Q11.2 R47.2 | length 5.2
  Top Layer w0.5: R47.2 92.728,120.269 Q11.2
$4N793: Q11.1 R45.2 R46.2 | length 3.1
  Top Layer w0.5: R45.2 R46.2@102.924,121.964 ; Q11.1@102.326,120.454 102.924,121.052 R46.2@102.924,121.964 ; R46.2 R46.2@102.924,121.964
$4N1281: LED6.2 R50.1 | length 1.3
  Top Layer w0.5: R50.1 95.674,109.531 LED6.2
$4N1287: CN6.2 D15.2 Q12.2 R50.2 | length 1.8
  Top Layer w0.5: R50.2 Q12.2@92.881,111.354
$4N1295: Q12.1 R48.2 R49.2 | length 3.2
  Top Layer w0.5: 102.343,112.947 R49.2@103.159,112.947 ; Q12.1 102.428,112.216 R49.2@103.159,112.947 ; 103.74,112.947 R49.2@103.159,112.947
+3.3V: C40.1 C42.2 C48.2 C49.2 C54.2 C57.2 C65.2 C68.2 C69.2 C70.2 C71.2 C72.2 C73.2 C74.2 CN12.3 CN13.3 CN14.3 LED7.2 R53.2 R54.2 R64.2 R65.2 R66.2 R67.2 R68.2 R73.2 R74.2 R75.2 R76.2 R77.2 SW3.2 U2.2 U4.2 U4.4 U7.5 U7.8 U10.1 U10.10 U17.8 | length 46.3
  Top Layer w0.3: C48.2@108.35,153.389 U10.10@108.35,154.789 ; U10.1@108.722,155.408 109.633,155.408 C49.2 ; v1(114.093,146.682) 114.093,147.79 C68.2 C69.2 114.358,149.738 U7.5 ; U7.8 117.226,151.287 C71.2 ; SW3.2 128.314,157.29 LED7.2 129.103,157.996 v1(129.386,158.279) ; R73.2 135.925,147.342 v1(135.972,147.294) ; v1(136.115,151.237) R65.2 ; v1(136.115,153.777) R66.2
  Top Layer w0.5: v1(87.114,158.871) 88.094,158.871 R75.2 ; v1(87.318,156.474) 88.349,156.474 R77.2 ; U17.8 98.997,159.133 C72.2 100.68,160.67 C73.2 100.833,160.619 v1(100.833,159.636) ; v1(99.711,177.997) v1(100.476,177.997) v1(101.241,177.997) 102.433,177.997 C57.2 C54.2 104.335,178.121 U2.2 ; R76.2 101.139,156.129 v1(101.139,154.944) ; v1(108.279,150.609) 108.279,153.283 C48.2 ; C49.2 112.962,154.834 v1(112.971,154.842) ; R54.2 111.816,157.29 v1(112.665,157.29) ; C71.2 C70.2 119.36,151.017 v1(120.621,151.017) ; v1(118.688,156.474) 118.688,157.239 R53.2 ; v1(120.927,147.345) 120.959,147.313 121.927,147.313 R74.2 ; v1(135.911,169.177) 135.966,169.122 R68.2 ; v1(136.023,166.776) 137.043,166.776 137.049,166.771 R67.2@137.055,166.776
  Top Layer w1: R64.2 108.365,115.451 C40.1@108.365,116.14
  other v1: 109.274,118.324 109.985,118.349 109.071,119.086 109.833,119.086 108.258,119.137
+5V: C31.1 C33.2 C36.2 C64.1 CN8.2 CN9.2 CN10.2 CN11.2 D12.2 L1.2 Q9.1 R38.2 R62.2 | length 60
  Top Layer w0.7: Q9.1@121.972,119.071 122.763,118.28 122.763,116.949 124.32,115.392 124.327,115.392 D12.2@124.413,115.306
  Top Layer w1: R62.2 123.493,114.558 124.327,115.392 D12.2 124.577,115.368 127.506,115.368 129.388,113.486 R38.2
  Top Layer w2: C64.1 138.146,115.725 CN10.2 142.704,115.725 142.729,115.7 143.383,115.7 143.469,115.613 143.469,125.109 142.5,126.078 CN11.2 ; CN8.2 142.347,95.07 142.372,95.095 142.579,95.095 143.558,96.073 143.558,106.594 ; CN9.2 142.335,105.372 143.558,106.594 ; 143.446,114.969 143.446,106.706 143.558,106.594
+VBAT: C27.1 C34.2 C35.2 C63.1 CN5.2 CN6.1 CN7.1 D15.1 D16.1 R44.2 U3.5 | length 82.8
  Top Layer w0.5: CN7.1 88.194,124.022 89.522,125.351 R44.2
  Top Layer w2: D16.1@89.817,125.067 88.772,124.022 88.194,124.022 87.329,124.022 87.129,123.823 87.091,123.823 86.158,122.89 86.158,114.514 ; D15.1 87.684,116.04 86.158,114.514 ; C34.2 100.81,94.882 102.156,93.536 ; CN5.2 117.485,92.692 115.732,90.938 104.754,90.938 102.156,93.536 ; 86.158,114.514 86.158,112.027 86.232,111.953 86.232,111.647 90.27,107.609 90.27,106.509 90.474,106.305 90.474,105.924 88.141,103.591 88.141,96.066 90.718,93.489 102.108,93.489 102.156,93.536
+VIN: BUZZER2.1 C39.1 C41.2 CN12.2 CN13.2 CN14.2 D12.1 D13.1 Q9.2 U4.3 | length 118.2
  Top Layer w0.5: CN14.2 v1(93.59,140.971) ; D13.1 112.308,124.241 114.174,126.107 114.757,126.107 ; 114.731,126.133 114.757,126.107 ; BUZZER2.1 122.257,126.133 v1(129.699,133.575) ; 121.717,116.661 121.717,117.281 119.918,119.08 119.918,123.415 117.225,126.107 114.757,126.107 ; CN13.2 142.959,149.027 142.959,160.605 141.838,161.727 CN12.2
  Top Layer w1: U4.3 113.58,111.243 115.433,113.096 C41.2 115.433,114.464 116.727,115.758 117.15,115.758 121.131,115.674 121.717,116.26 121.717,116.661
  Bottom Layer w0.5: v1(93.59,140.971) 108.483,126.078 117.175,126.078 BUZZER2.1 ; v1(129.699,133.575) 132.402,136.278 132.402,142.449 136.226,146.273 CN13.2
+VUSB: C55.2 D4.5 Q9.3 USB3.A4B9 USB3.B4A9 | length 34.6
  Top Layer w0.5: Q9.3 125.144,118.172 135.243,128.271 135.243,133.169 C55.2 135.192,133.475 134.358,134.309 134.358,135.75 133.967,136.141 D4.5 ; 133.232,134.136 133.983,134.136 ; C55.2@135.319,133.093 136.143,133.093 136.651,133.601 137.441,133.601 USB3.A4B9 136.702,133.614 v1(136.079,134.236) ; v1(136.079,137.983) 136.511,138.414 USB3.B4A9
  Bottom Layer w0.5: v1(136.079,134.236) v1(136.079,137.983)
BOOT: C53.2 C60.2 R73.1 SW2.2 U2.27 | length 26.1
  Top Layer w0.5: U2.27 127.883,162.881 134.34,156.423 134.34,148.329 134.317,148.329 R73.1@133.483,147.495 ; C60.2 C53.2 R73.1
BUZZER: R63.1 U2.10 | length 49.1
  Top Layer w0.5: v1(102.716,134.952) 102.716,165.276 105.401,167.961 U2.10 ; v1(104.732,133.473) 104.732,133.348 109.401,128.679 109.401,123.897 R63.1
  Bottom Layer w0.5: v1(102.716,134.952) 104.195,133.473 v1(104.732,133.473)
CS_BARO: R54.1 U2.18 U10.6 | length 10.5
  Top Layer w0.3: U10.6@106.979,155.908 106.857,155.908 106.679,156.085 106.679,157.227 109.158,159.706 109.583,159.706 110.358,158.93 R54.1 U2.18
CS_IMU: R53.1 U2.22 U7.12 | length 12.6
  Top Layer w0.3: U7.12 115.358,158.504 v1(116.847,159.993) 116.847,161.517 U2.22 ; v1(117.612,158.412) 118.355,158.412 R53.1
  Bottom Layer w0.3: v1(116.847,159.993) 116.847,159.177 v1(117.612,158.412)
D+: D4.3 USB3.A6 USB3.B6 | length 4.5
  Top Layer w0.254: D4.3 135.817,136.788 137.43,136.788 USB3.B6 137.382,136.693 136.763,136.693 136.6,136.53 136.6,135.999 136.834,135.764 USB3.A6
D-: D4.1 USB3.A7 USB3.B7 | length 4.5
  Top Layer w0.254: USB3.B7 138.073,135.264 138.308,135.499 138.308,136.136 138.175,136.268 137.457,136.268 USB3.A7
  Top Layer w0.3: D4.1 135.587,135.264 USB3.B7
GND: C27.2 C31.2 C33.1 C34.1 C39.2 C40.2 C41.1 C42.1 C43.1 C48.1 C49.1 C52.1 C53.1 C54.1 C55.1 C56.1 C57.1 C60.1 C63.2 C64.2 C65.1 C68.1 C69.1 C70.1 C71.1 C72.1 C73.1 C74.1 CN5.1 CN8.3 CN9.3 CN10.3 CN11.3 CN12.1 CN13.1 CN14.1 D4.2 D11.1 D14.2 LED4.1 LED5.1 LED6.1 Q10.2 Q11.3 Q12.3 R37.2 R42.1 R45.1 R48.1 R60.2 R61.2 R62.1 R78.1 SW1.1 SW2.1 U2.1 U2.40 U2.41 U3.1 U4.1 U7.2 U7.3 U7.6 U7.7 U10.3 U10.8 U10.9 U17.4 USB3.1 USB3.2 USB3.3 USB3.4 USB3.A1B12 USB3.A8 USB3.B1A12 USB3.B8 | length 60.7
  Top Layer w0.3: v1(106.953,150.609) 106.967,150.623 C65.1 ; C65.1 C48.1 107.35,153.755 107.35,154.789 U10.9@107.85,154.789 ; U10.3 108.636,156.793 v1(108.636,157.188) ; C49.1 C49.1@110.213,153.428 ; v1(110.268,152.241) 110.268,153.373 C49.1@110.213,153.428 ; v1(111.951,152.292) 111.9,152.343 C74.1 C49.1@110.213,153.428 ; U2.41@111.958,170.271 111.958,171.671 111.958,173.071 U2.41@113.358,173.071 ; v1(112.716,152.037) 113.346,152.037 U7.3 U7.2 ; U2.41@113.358,170.271 113.358,171.671 U2.41@113.358,173.071 ; U2.41@114.758,170.271 114.758,171.671 114.758,173.071 U2.41@113.358,173.071 ; U7.6 U7.7 115.558,150.825 C69.1 C68.1 115.572,147.841 v1(115.572,146.58) ; v1(117.561,148.365) C71.1 ; v1(119.244,148.416) 119.295,148.467 C70.1 ; C56.1 127.877,145.611 ; C52.1 127.855,147.345 127.877,147.367 ; SW1.1 128.832,150.209 128.832,151.272 ; 129.24,145.611 130.338,145.611 C60.1 ; 129.24,147.396 130.331,147.396 C53.1 ; 129.699,151.221 129.911,151.009 SW2.1 ; USB3.A1B12 137.965,132.303 138.276,132.303 USB3.1@138.276,131.951 ; USB3.B8 138.559,134.264 139.146,133.678 139.146,132.864 138.47,132.189 138.47,132.145 USB3.1@138.276,131.951 ; USB3.A8 139.129,137.264 USB3.4 ; USB3.B1A12 137.4,139.267 v1(137.4,141.633) 138.019,141.014 USB3.2 138.565,140.88 ; USB3.1 USB3.1@138.276,131.951
  Top Layer w0.5: v1(91.5,154.383) 91.897,154.78 ; U17.4 91.897,154.78 ; v1(92.265,154.383) 91.897,154.751 91.897,154.78 ; R48.1 101.782,115.371 Q12.3 ; v1(134.365,138.305) 134.353,138.293 134.353,136.607 134.831,136.129 135.502,136.129 D4.2
  other v1: 95.376,86.31 100.456,86.31 105.536,86.31 110.616,86.31 115.696,86.31 120.776,86.31 125.856,86.31 130.936,86.31 121.59,90.581 122.355,90.581 122.202,91.295 90.296,91.39 95.376,91.39 121.386,91.397 125.856,91.39 136.016,91.39 122.253,94.407 122.202,95.172 90.378,96.141 91.041,96.141 105.536,96.47 110.616,96.47 115.696,96.47 120.776,96.47 136.016,96.47 90.378,96.855 91.092,96.855 96.243,97.263 96.192,98.028 95.376,99.927 120.776,101.55 136.016,101.55 95.376,105.007 98.793,106.492 120.776,106.63 136.016,106.63 98.793,107.31 104.76,107.563 105.576,107.563 98.334,109.605 122.304,109.758 90.296,110.087 100.456,110.087 105.536,110.087 107.871,110.37 115.011,110.37 107.922,111.237 105.423,111.645 141.096,111.71 122.049,112.461 117.918,113.43 118.734,113.583 125.568,114.246 100.456,115.167 130.936,115.167 114.042,117.306 114.654,117.306 101.088,117.357 101.802,117.357 102.465,117.357 103.179,117.357 105.066,117.459 105.117,118.224 98.232,118.53 105.015,118.938 130.936,119.594 130.936,120.247 141.096,120.247 106.647,120.315 114.003,120.537 124.163,120.537 120.927,121.131 134.009,121.589 134.672,121.589 135.335,121.589 104.352,122.814 136.016,124.674 136.016,125.327 124.163,125.617 129.243,125.617 130.033,125.617 99.66,126.078 100.323,126.078 101.037,126.078 101.751,126.078 95.306,128.934 87.114,130.107 95.427,130.362 132.638,130.364 100.456,130.407 137.349,130.413 108.923,130.697 109.713,130.697 114.003,130.697 114.793,130.697 119.083,130.697 119.873,130.697 124.163,130.697 129.243,130.697 130.033,130.697 134.323,130.697 86.91,130.821 141.096,134.834 91.316,135.385 95.376,135.487 100.456,135.487 141.096,135.487 108.923,135.777 109.713,135.777 114.003,135.777 100.405,137.578 129.89,138.104 115.696,139.914 120.776,139.914 130.936,139.914 136.016,139.914 95.376,140.567 100.456,140.567 115.696,140.567 120.776,140.567 130.936,140.567 136.016,140.567 108.923,140.857 125.262,144.132 129.954,144.132 110.616,144.994 115.696,144.994 120.776,144.994 136.016,144.994 141.096,144.994 90.296,145.647 95.376,145.647 100.456,145.647 110.616,145.647 115.696,145.647 120.776,145.647 109.905,146.874 111.81,146.874 90.041,147.361 110.616,150.074 136.016,150.074 141.096,150.074 90.296,150.727 95.376,150.727 100.456,150.727 110.616,150.727 129.648,152.139 92.928,152.547 129.75,153.21 120.776,155.154 136.016,155.154 141.096,155.154 95.376,155.807 120.776,155.807 136.016,155.807 141.096,155.807 89.154,157.791 110.829,159.993 136.016,160.234 105.536,160.887 130.936,160.887 136.016,160.887 92.877,160.911 90.327,161.37 88.134,161.931 99.079,163.284 100.68,163.359 89.664,163.41 92.979,163.869 110.616,165.314 115.696,165.314 130.936,165.314 125.346,165.365 100.456,165.967 110.616,165.967 115.696,165.967 120.776,165.967 130.936,165.967 93.489,166.623 101.955,167.388 102.567,169.837 110.616,170.394 120.776,170.394 141.096,170.394 90.296,171.047 110.616,171.047 120.776,171.047 130.936,171.047 141.096,171.047 102.516,171.112 102.465,172.438 97.773,172.591 130.606,173.036 102.567,173.662 100.935,174.937 127.047,175.294 115.696,175.474 120.776,175.474 95.376,176.127 110.616,176.127 115.696,176.127 120.776,176.127 102.516,176.467 128.066,177.514 125.058,179.272 125.721,179.272 100.225,179.552 101.296,179.552 125.058,179.935 125.772,179.935 102.567,180.267 104.301,180.267
INT1_ACCEL: U2.24 U7.4 | length 17
  Top Layer w0.3: v1(112.359,150.456) 112.359,150.915 112.731,151.287 U7.4 ; v1(119.295,160.248) 119.295,161.593 U2.24
  Bottom Layer w0.3: v1(112.359,150.456) 112.716,150.099 113.481,150.099 119.295,155.913 v1(119.295,160.248)
INT2_GYRO: U2.23 U7.9 | length 11.7
  Top Layer w0.3: U7.9 116.171,151.787 116.178,151.794 116.583,151.794 116.76,151.971 116.76,153.052 115.76,154.052 115.76,158.048 118.033,160.321 U2.23
INT_BARO: U2.17 U10.7 | length 9
  Top Layer w0.3: U10.7@106.979,155.408 106.931,155.456 106.507,155.456 106.277,155.686 106.277,157.394 108.992,160.108 109.873,160.108 110.413,160.648 U2.17
IO4: CN14.5 U2.4 | length 56.6
  Top Layer w0.3: CN14.5 88.442,133.471 86.104,135.809 86.104,162.714 98.971,175.581 U2.4
IO5: CN14.4 U2.5 | length 53.3
  Top Layer w0.3: CN14.4 87.778,135.971 86.506,137.243 86.506,162.548 98.269,174.311 U2.5
M_CLK: U2.9 U17.6 | length 24.5
  Top Layer w0.3: U17.6 96.746,156.553 96.057,157.242 96.057,168.017 97.265,169.224 106.101,169.224 U2.9
M_CS: R75.1 U2.6 U17.1 | length 27.1
  Top Layer w0.3: U17.1 93.856,159.093 94.851,160.088 94.851,168.516 99.385,173.05 106.099,173.05 U2.6
  Top Layer w0.5: R75.1 91.828,159.024 U17.1
M_IO0: U2.8 U17.5 | length 26.7
  Top Layer w0.3: U17.5 98.804,155.283 98.753,155.232 97.396,155.232 95.655,156.974 95.655,168.183 97.973,170.501 U2.8
M_IO1: U2.7 U17.2 | length 25.2
  Top Layer w0.3: U17.2 93.614,157.823 95.253,159.463 95.253,168.35 98.675,171.771 U2.7
M_IO2: R77.1 U17.3 | length 2
  Top Layer w0.5: R77.1 91.869,156.525 U17.3
M_IO3: R76.1 U17.7 | length 2.2
  Top Layer w0.5: U17.7 100.951,157.823 R76.1
MISO: U2.20 U7.1 U10.5 | length 18.1
  Top Layer w0.3: U10.5@107.361,156.538 107.361,157.34 109.045,159.024 v1(109.401,159.024) ; U7.1 113.596,157.762 114.144,158.31 114.144,159.78 v1(114.096,159.828) 114.096,161.474 U2.20
  Bottom Layer w0.3: v1(109.401,159.024) 113.94,159.024 114.096,159.18 v1(114.096,159.828)
MOSI: U2.19 U7.14 U10.4 | length 15.4
  Top Layer w0.3: U10.4@107.871,156.548 107.871,157.282 108.814,158.225 112.874,158.225 v1(113.004,158.355) 113.004,161.55 U2.19 ; v1(114.246,156.729) 114.358,156.617 U7.14
  Bottom Layer w0.3: v1(113.004,158.355) 113.004,157.971 v1(114.246,156.729)
PYRO1: R46.1 U2.11 | length 46.7
  Top Layer w0.5: R46.1 103.084,123.528 103.855,123.528 104.77,124.443 104.77,131.561 103.423,132.908 103.423,164.93 105.293,166.799 106,166.799 U2.11
PYRO2: R49.1 U2.12 | length 54.3
  Top Layer w0.5: R49.1 103.74,114.453 104.315,115.029 104.315,118.638 104.308,118.645 104.308,121.274 105.372,122.338 105.372,131.81 104.025,133.157 104.025,164.461 104.887,165.323 106.01,165.323 U2.12
RESET: C52.2 C56.2 R74.1 SW1.2 U2.3 | length 41.8
  Top Layer w0.5: U2.3 108.456,176.851 v1(108.534,176.773) ; R74.1 123.465,149.161 123.834,149.53 v1(123.834,151.731) ; R74.1@123.528,147.345 C52.2 C56.2
  Bottom Layer w0.5: v1(108.534,176.773) 123.783,161.523 123.783,151.782 v1(123.834,151.731)
RX0: CN13.4 R65.1 U2.36 | length 32.4
  Top Layer w0.3: U2.36 125.615,174.311 137.913,162.013 137.913,151.47 138.213,151.17 140.102,151.17 CN13.4
RX1: CN12.4 R67.1 U2.38 | length 22.3
  Top Layer w0.3: U2.38 130.539,176.851 137.754,169.635 137.754,167.131 138.159,166.727 CN12.4
SCK: U2.21 U7.13 U10.2 | length 18.9
  Top Layer w0.3: U10.2 v1(112.002,155.908) ; U7.13 114.858,159.039 115.47,159.651 v1(115.47,159.993) 115.493,160.016 U2.21
  Bottom Layer w0.3: v1(112.002,155.908) 114.283,155.908 114.853,156.478 114.853,158.952 115.47,159.569 v1(115.47,159.993)
SERVO1: CN11.1 U2.34 | length 63.6
  Top Layer w0.5: U2.34 125.623,171.771 v1(128.373,169.02)
  Bottom Layer w0.5: v1(128.373,169.02) 128.53,168.864 128.53,124.85 129.802,123.578 CN11.1@141.48,123.578
SERVO2: CN10.1 U2.33 | length 71.3
  Top Layer w0.5: U2.33 125.312,170.501 v1(126.69,169.122)
  Bottom Layer w0.5: v1(126.69,169.122) 127.928,167.885 127.928,117.175 131.878,113.225 CN10.1@141.429,113.225
SERVO3: CN9.1 U2.32 | length 79.9
  Top Layer w0.5: U2.32 125.249,169.231 v1(126.173,168.306)
  Bottom Layer w0.5: v1(126.173,168.306) 127.326,167.154 127.326,108.153 132.607,102.872 CN9.1@141.429,102.872
SERVO4: CN8.1 U2.31 | length 86.8
  Top Layer w0.5: U2.31 125.098,167.961 v1(125.568,167.49)
  Bottom Layer w0.5: v1(125.568,167.49) 126.724,166.335 126.724,101.87 136.024,92.57 CN8.1@141.378,92.57
TX0: CN13.5 R66.1 U2.37 | length 30.4
  Top Layer w0.3: U2.37 124.914,175.581 138.522,161.972 138.522,153.879 138.675,153.726 139.691,153.726 139.738,153.773 CN13.5
TX1: CN12.5 R68.1 U2.39 | length 20.3
  Top Layer w0.3: U2.39 123.659,178.172 129.786,178.172 138.681,169.277 140.154,169.277 CN12.5
USB_D+: D4.4 U2.14 | length 50
  Top Layer w0.3: U2.14 105.229,162.881 104.929,162.581 104.929,146.775 115.376,136.329 131.79,136.329 132.552,137.091 D4.4
USB_D-: D4.6 U2.13 | length 52.3
  Top Layer w0.3: U2.13 104.957,164.151 104.527,163.721 104.527,146.609 115.209,135.927 131.733,135.927 132.469,135.191 D4.6
V_BATT: C43.2 D14.1 R42.2 R44.1 U2.35 | length 64.4
  Top Layer w0.5: R44.1 R42.2 92.738,129.14 C43.2 C43.2@92.687,130.464 ; D14.1 C43.2@92.687,130.464 ; v1(92.469,132.555) 92.469,130.682 C43.2@92.687,130.464 ; v1(108.789,165.501) 111.237,167.949 116.235,167.949 121.326,173.041 U2.35
  Bottom Layer w0.5: v1(92.469,132.555) 92.469,149.181 v1(108.789,165.501)
pads on no net: CN5.3 CN5.4 U2.15 U2.16 U2.26 U2.28 U2.29 U2.30 U7.10 U7.11

## Polygon pours and split planes (outlines as drawn)
GND on Top Layer (solid, remove dead copper, pour order 0): 80.127,185.443 152.599,185.443 152.599,77.423 80.127,77.423
GND on Bottom Layer (solid, remove dead copper, pour order 2): 76.2,186.156 153.414,186.156 153.414,76.2 76.2,76.2

## Keep-outs
Top Layer:
  region: 93.858,85.863 cw(c89.858,85.863) 85.858,85.863 cw(c89.858,85.863)
  region: 143.858,85.863 cw(c139.858,85.863) 135.858,85.863 cw(c139.858,85.863)
  region: 143.858,175.881 cw(c139.858,175.881) 135.858,175.881 cw(c139.858,175.881)
  region: 93.858,175.881 cw(c89.858,175.881) 85.858,175.881 cw(c89.858,175.881)
Board Outline Layer:
  circle w0.025: c89.858,175.881 r1.6
  region: 91.458,175.881 cw(c89.858,175.881) 88.258,175.881 cw(c89.858,175.881)
  circle w0.025: c139.858,175.881 r1.6
  region: 141.458,175.881 cw(c139.858,175.881) 138.258,175.881 cw(c139.858,175.881)
  circle w0.025: c139.858,85.863 r1.6
  region: 141.458,85.863 cw(c139.858,85.863) 138.258,85.863 cw(c139.858,85.863)
  circle w0.025: c89.858,85.863 r1.6
  region: 91.458,85.863 cw(c89.858,85.863) 88.258,85.863 cw(c89.858,85.863)
  lines w0.1: 84.858,85.872 84.858,175.872 cw(c89.858,175.872) 89.858,180.872 139.858,180.872 cw(c139.858,175.872) 144.858,175.872 144.858,85.872 cw(c139.858,85.872) 139.858,80.872 89.858,80.872 cw(c89.858,85.872) 84.858,85.872

## Other copper
Top Layer:
  region net GND: 142.467,128.578 cw(c141.322,128.578) 140.178,128.578 cw(c141.322,128.578)
  region net GND: 141.35,159.226 cw(c140.205,159.226) 139.061,159.226 cw(c140.205,159.226)
  region net GND: 141.35,143.773 cw(c140.205,143.773) 139.061,143.773 cw(c140.205,143.773)
  region net GND: 99.303,127.608 103.638,127.608 103.638,124.242 99.303,124.242
  region net GND: 99.991,118.581 103.714,118.581 103.714,115.215 99.991,115.215
  region net GND: 96.421,92.009 101.827,92.009 101.827,88.541 96.421,88.541
  region net GND: 121.055,96.039 126.333,96.039 126.333,87.317 121.055,87.317
  region net GND: 89.523,102.414 91.997,102.414 91.997,96.549 89.523,96.549
  region net GND: 98.562,108.369 102.77,108.369 102.77,106.125 98.562,106.125
  region net GND: 107.488,108.419 107.488,112.002 109.809,112.002 109.809,108.419
  region net GND: 140.728,139.485 140.728,141.334 142.998,141.334 142.998,139.485
  region net GND: 140.724,130.77 140.724,132.618 143.045,132.618 143.045,130.77
  region net GND: 136.827,130.815 136.827,132.767 137.99,132.767 137.99,130.815
  region net GND: 139.099,129.098 136.841,129.098 136.841,132.454 139.099,132.454
  region net GND: 139.113,139.648 136.906,139.648 136.906,142.8 139.113,142.8
  region net GND: 138.012,139.389 136.89,139.389 136.89,142.212 138.012,142.212
  region net GND: 104.997,178.869 98.964,178.869 98.964,180.236 104.997,180.236
  region net GND: 135.781,116.438 133.308,116.438 133.308,122.303 135.781,122.303
  region net GND: 142.146,117.057 140.193,117.057 140.193,119.393 142.146,119.393
  region net GND: 142.092,107.004 140.091,107.004 140.091,108.938 142.092,108.938
  region net GND: 142.092,96.447 140.067,96.447 140.067,98.791 142.092,98.791
  region net +VBAT: 96.55,100.773 98.963,100.773 99.217,100.519 102.392,100.519 102.392,92.477 99.217,92.477 99.217,99.334 96.719,99.334 96.677,99.376 96.677,100.646
  region net $3N2267: 102.011,103.821 103.958,103.821 103.958,106.954 103.916,106.996 116.061,106.996 116.061,111.956 119.645,111.956 119.645,98.995 103.958,98.995 103.958,102.738 102.078,102.738 102.011,102.805
  region net +3.3V: 110.772,111.841 110.772,111.466 111.788,111.466 111.788,111.856 113.058,112.917 113.058,115.444 110.137,115.784 109.488,115.135
  region net +3.3V: 110.773,119.542 110.773,117.435 113.058,117.435 113.058,112.788 111.788,111.518 111.788,111.466 110.713,111.466 109.538,112.641 109.538,114.784 109.16,115.162 107.473,115.162 107.473,119.542
  region net $4N1287: 89.738,110.847 89.738,111.645 88.083,111.645 88.083,113.214 92.899,113.214 92.899,110.847
  region net $4N18: 89.727,119.845 89.727,120.643 88.071,120.643 88.071,122.212 92.888,122.212 92.888,119.845
  region net +VBAT: 87.279,123.16 87.279,126.088 91.358,126.088 91.358,123.16
  region net +VBAT: 87.369,114.195 87.369,117.123 91.448,117.123 91.448,114.195
  region net +5V: 127.466,88.2 127.36,103.209 127.36,105.557 128.747,109.343 128.747,114.156 135.401,114.156 135.411,110.166 133.124,110.16 133.124,88.2

## Silkscreen, mask and mechanical layers (free items; w line width, h text height)
Top Silkscreen Layer:
  drawing of 25 lines, arcs and shapes, not listed
  text "1" at 141.327,168.204 h2
  text "2" at 141.225,165.705 h2
  text "3V3" at 141.123,163.053 h2
  text "5V" at 141.174,160.452 h2
  text "GND" at 141.123,158.055 h2
  text "TX0" at 141.225,152.649 h2
  text "EN" at 125.211,151.272 h2
  text "B0" at 131.025,151.221 h2
  text "RX0" at 141.276,150.15 h2
  text "3V3" at 141.021,147.651 h2
  text "5V" at 141.531,145.101 h2
  text "GND" at 141.174,142.704 h2
  text "2026 ALTIS AVIONICS V2.0 / Designed by OK GWI DONG" at 106.086,128.577 h1.5
  text "G" at 142.959,127.506 h2
  text "5V" at 142.245,125.058 h2
  text "S1" at 137.604,124.752 h2.5
  text "S1" at 142.653,122.61 h2
  text "P1" at 85.023,121.386 h2.5
  text "S2" at 141.888,119.142 h2.5
  text "G" at 142.755,117.051 h2
  text "5V" at 142.245,114.654 h2
  text "P2" at 84.972,112.308 h2.5
  text "S2" at 142.296,112.155 h2
  text "GND" at 136.992,106.698 h2
  text "5V" at 137.91,104.454 h2
  text "S3" at 134.595,103.791 h2.5
  text "S3" at 138.114,101.802 h2
  text "GND" at 136.839,96.498 h2
  text "5V" at 137.91,93.948 h2
  text "S4" at 134.517,93.681 h2.5
  text "S4" at 137.961,91.448 h2
Bottom Silkscreen Layer:
  drawing of 31 lines, arcs and shapes, not listed
  text "1" at 142.908,168.051 h2
  text "2026 ALTIS AVIONICS V2.0 / Designed by OK GWI DONG / Date: 2026.02.08" at 127.659,166.317 h2
  text "2" at 143.061,165.756 h2
  text "3V3" at 144.744,163.308 h2
  text "5V" at 143.877,160.605 h2
  text "GND" at 144.693,158.106 h2
  text "TX0" at 144.744,152.649 h2
  text "RX0" at 144.693,150.099 h2
  text "3V3" at 144.795,147.6 h2
  text "5V" at 144.03,144.846 h2
  text "GND" at 144.693,142.551 h2
  text "GND" at 88.695,142.296 h2
  text "5V" at 87.879,139.95 h2
  text "3V3" at 88.695,137.247 h2
  text "5" at 87.267,135.105 h2
  text "4" at 87.318,132.147 h2
  text "G" at 143.928,127.404 h2
  text "V" at 144.03,124.905 h2
  text "S1" at 133.728,124.854 h2.5
  text "S1" at 144.387,122.406 h2
  text "P1" at 98.64,121.59 h2.5
  text "G" at 143.877,117 h2
  text "V" at 143.928,114.756 h2
  text "S2" at 133.728,114.45 h2.5
  text "P2" at 98.487,112.512 h2.5
  text "S2" at 144.54,112.257 h2
  text "G" at 143.979,106.8 h2
  text "V" at 143.877,104.25 h2
  text "S3" at 133.473,103.893 h2.5
  text "S3" at 144.54,101.904 h2
  text "G" at 143.979,96.498 h2
  text "V" at 143.979,93.795 h2
  text "S4" at 133.473,93.642 h2.5
  text "S4" at 144.438,91.499 h2
Mechanical Layer:
  circle w0.025: c89.858,175.881 r1.6
  circle w0.025: c139.858,175.881 r1.6
  circle w0.025: c139.858,85.863 r1.6
  circle w0.025: c89.858,85.863 r1.6
Mech6:
  drawing of 3 lines, arcs and shapes, not listed

## Text inside footprints (layer, text, board x,y; h text height)
BUZZER2: Top Silkscreen Layer "+" at 118.84,126.563 h1.27 r270